# Altium PCB console_pcb.PcbDoc (part 1 of 2)
Units mil, origin at the board's own origin, x right, y up, seen from the top; angles counter-clockwise.
Board outline 3400 x 2600 mil, 2 copper layers (Top Layer, Bottom Layer); 190 components, 169 nets, 733 pads, 281 vias.
Unrouted connection lines stored in the file: 81.
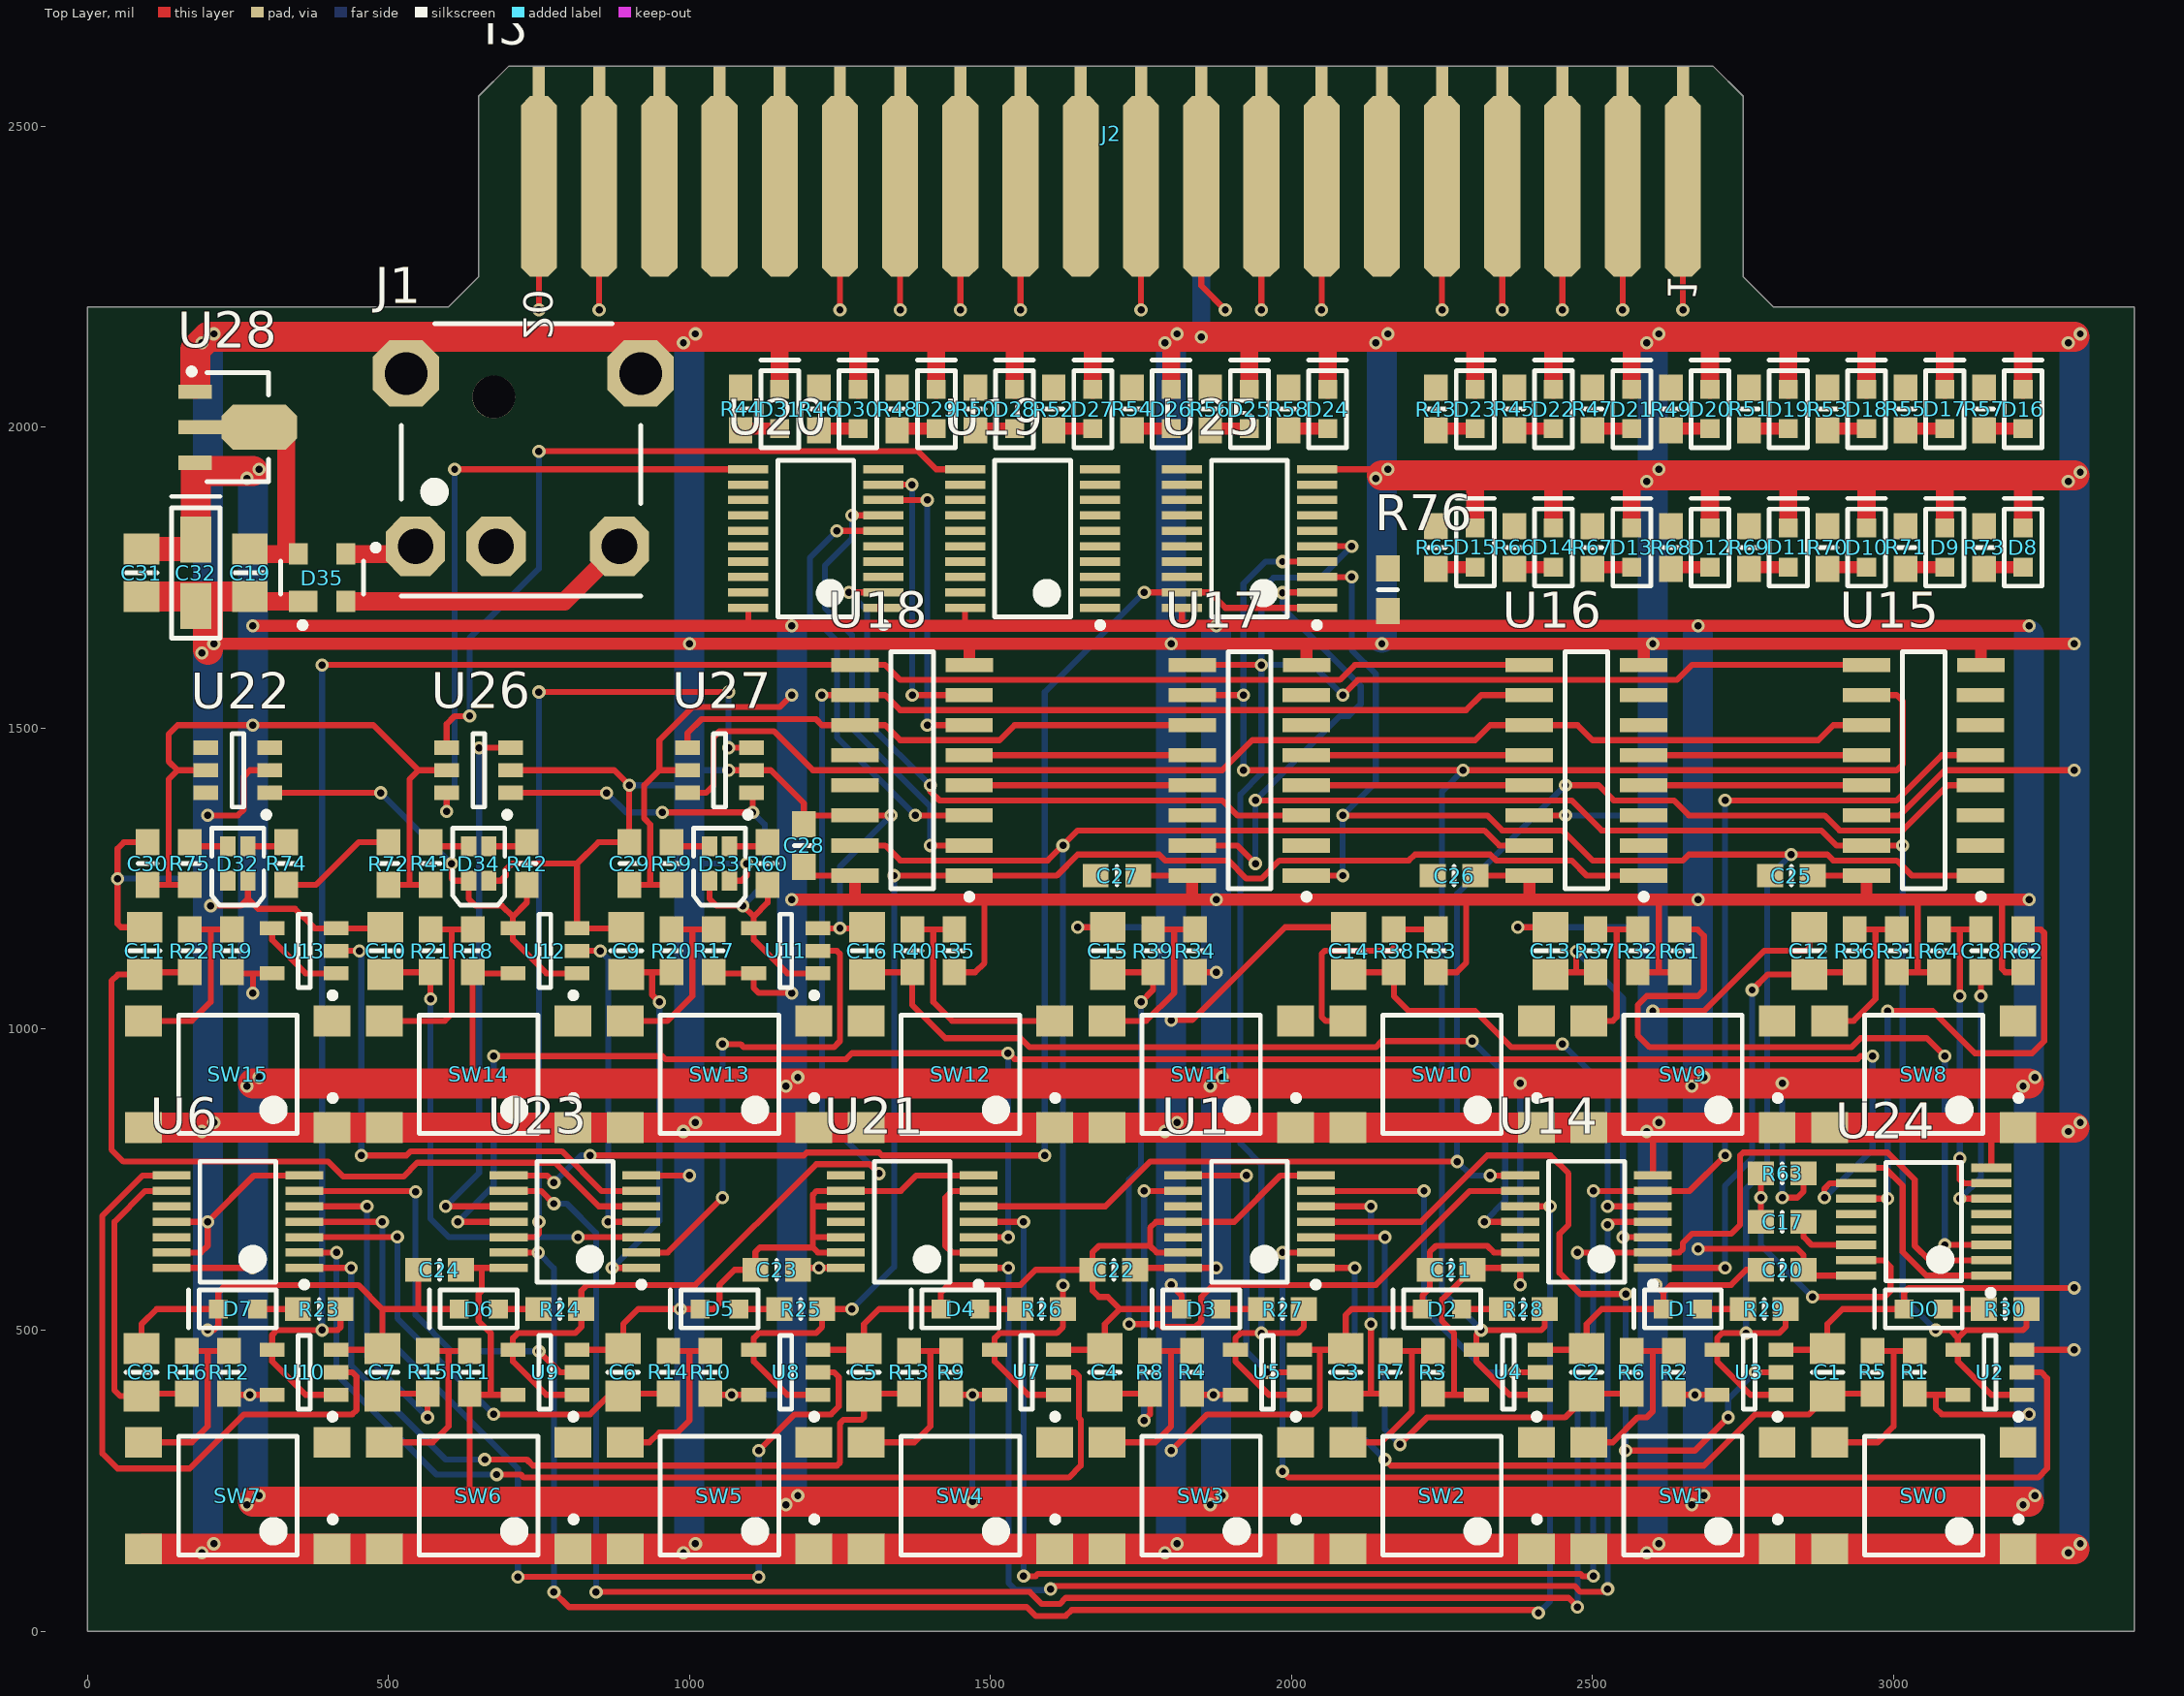
[diagram p0: Top Layer view]
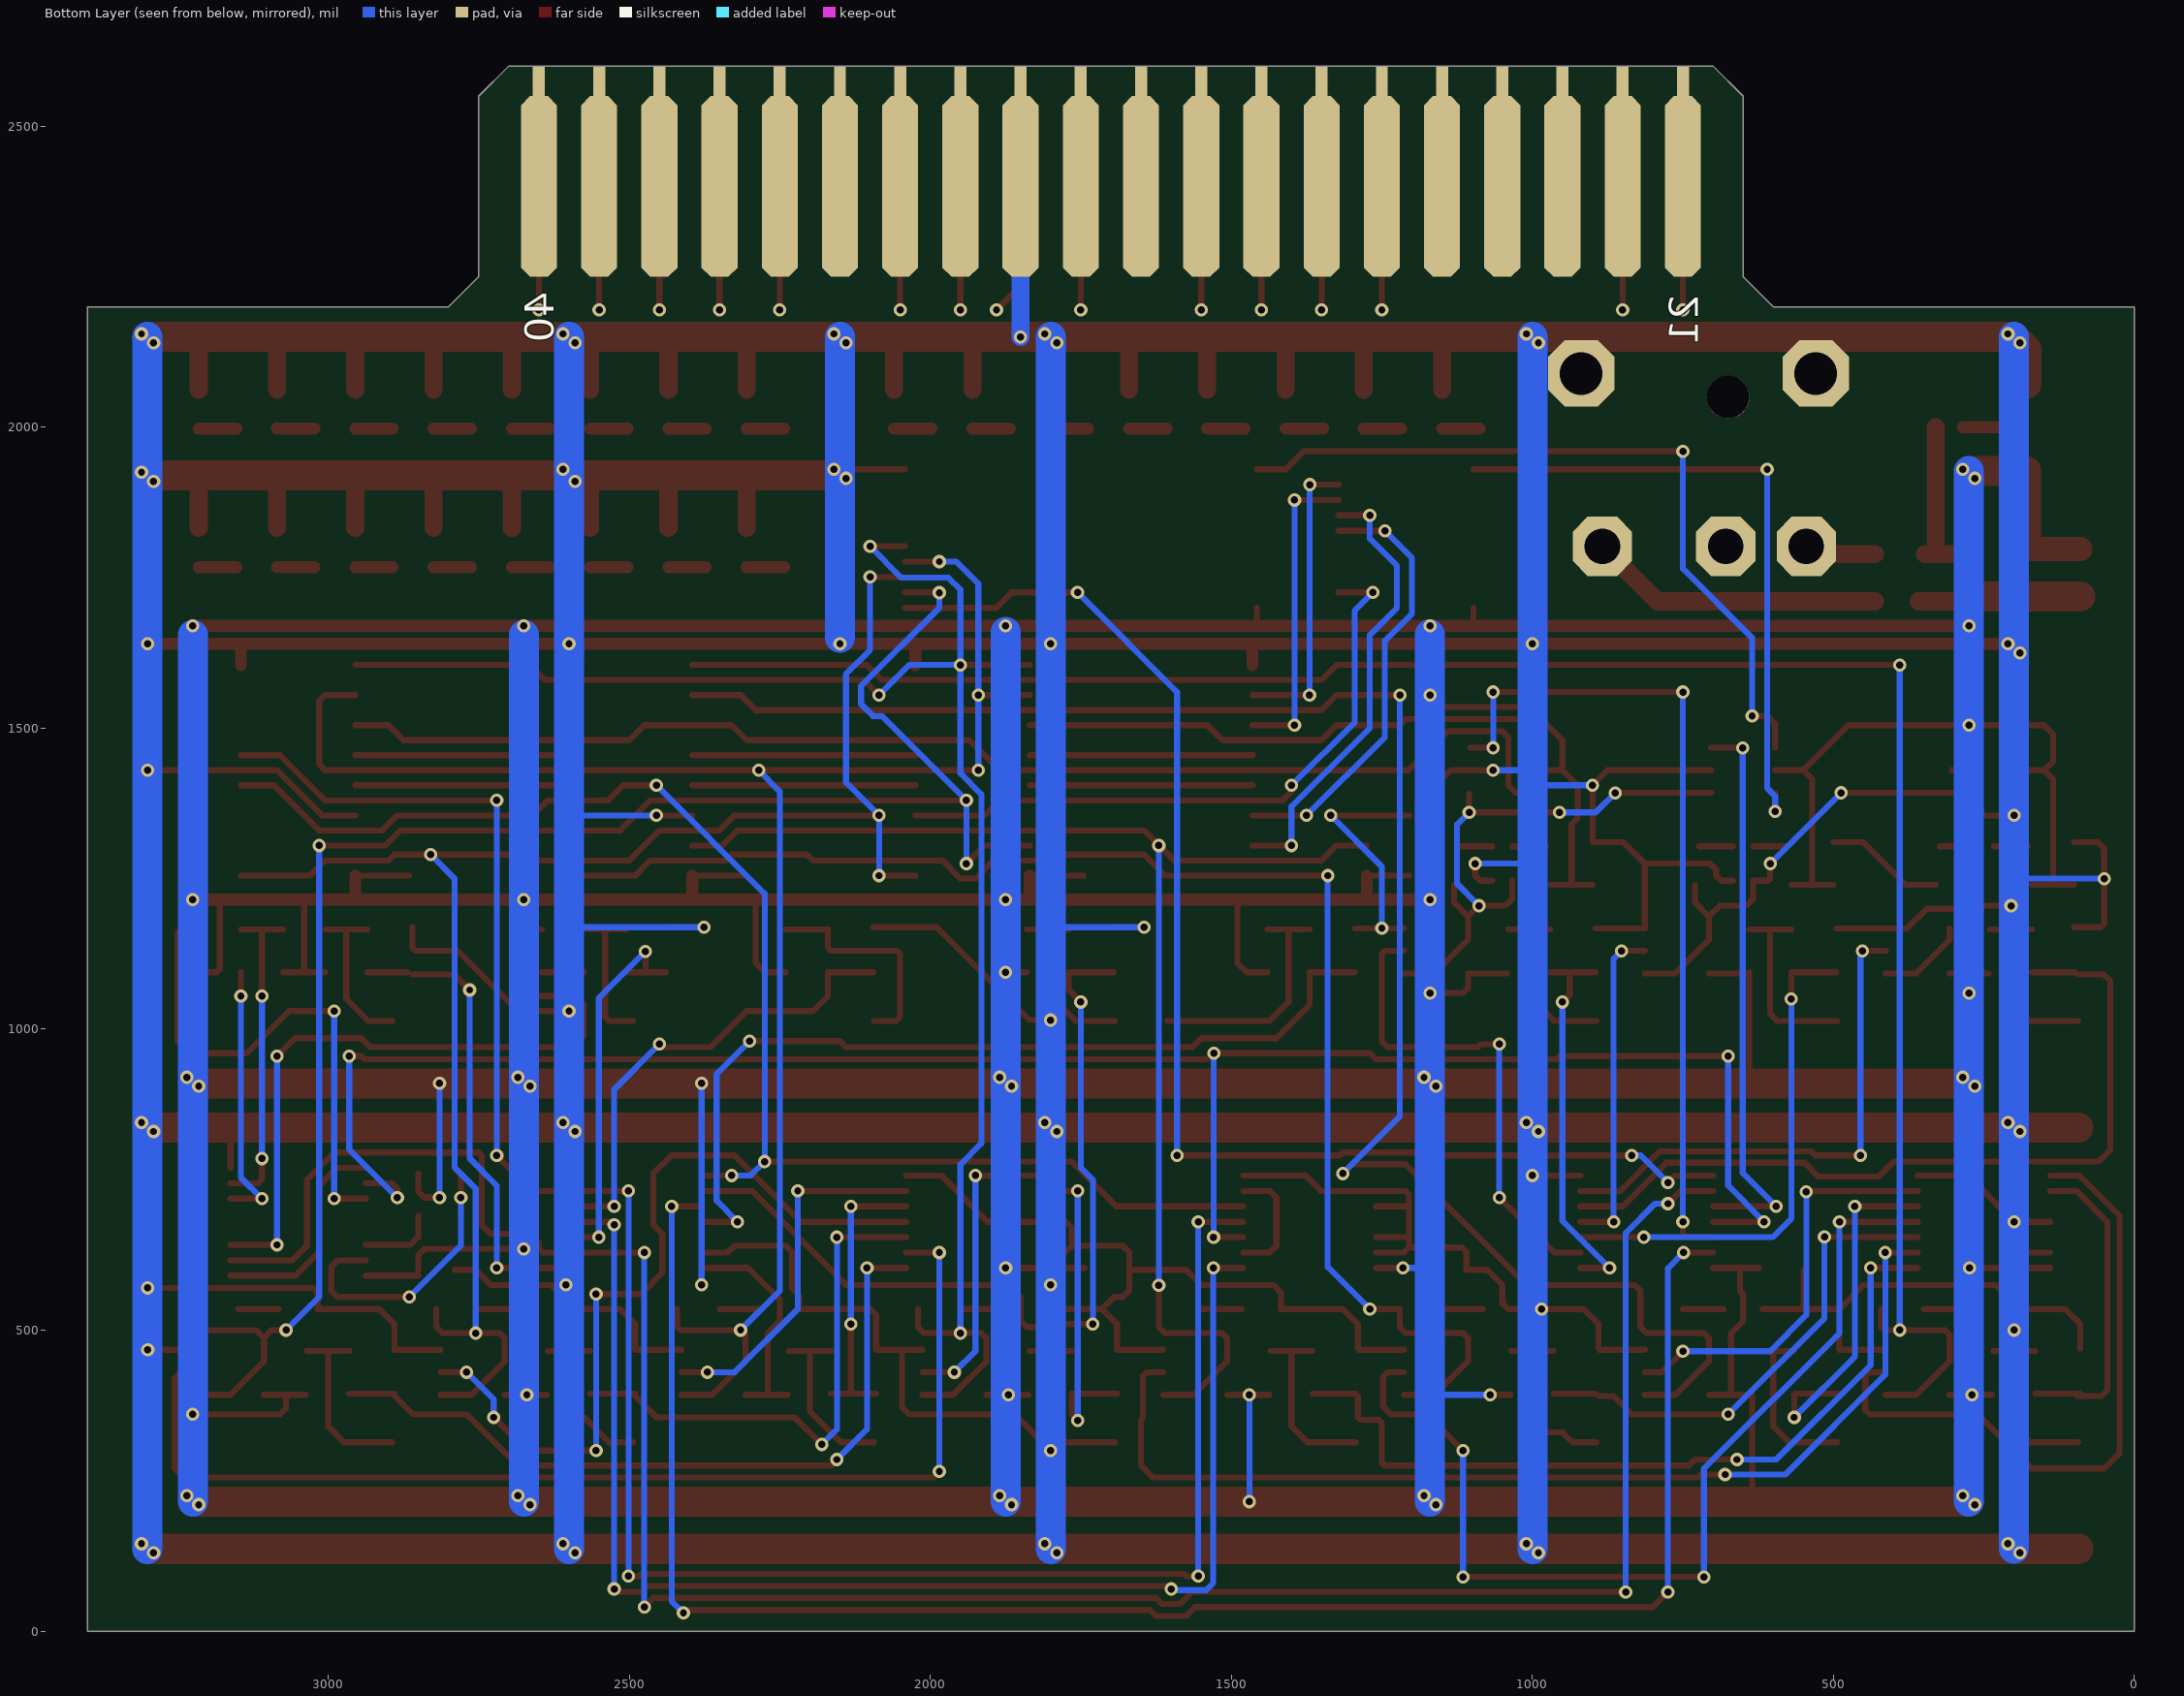
[diagram p1: Bottom Layer view, seen from below]

## Layer stack, top to bottom
Top Layer: signal copper 1.4
Dielectric: core 12.6, FR-4, Dk 4.8
Bottom Layer: signal copper 1.4

## Board outline
0,0 3400,0 3400,2200 2800,2200 2750,2250 2750,2550 2700,2600 700,2600 650,2550 650,2250 600,2200 0,2200 0,0

## Design rules (kind name [scope] priority, off if disabled: settings)
Clearance [All] p1: gap=7
ComponentClearance [All] p1: gap=0 collisioncheckmode=3 verticalgap=0 showdistances=FALSE
ComponentClearance "ComponentClearance Fiducial" [(HasFootprint('FIDUCIAL'))] p2: gap=-10 collisioncheckmode=3 verticalgap=-10 showdistances=FALSE
PolygonConnect [All] p1: connectstyle=Relief reliefconductorwidth=10 reliefentries=4 polygonreliefangle="90 Angle"
RoutingVias [All] p1: holewidth=12 width=22 viastyle="Through Hole" minholewidth=12 minwidth=22 maxholewidth=12 maxwidth=22
SilkscreenOverComponentPads [All] p1: minsilkscreentomaskgap=10
SolderMaskExpansion SolderMaskExpansion_VIA [isvia] p1: expansion=-50
SolderMaskExpansion [All] p2: expansion=6
Width [All] p1: maxlimit=100 minlimit=10 preferedwidth=10
26 further rules are at their usual default settings.

## Classes and differential pairs
component class console_schematic_logic: C17 C18 D8 D9 D10 D11 D12 D13 D14 D15 D16 D17 D18 D19 D20 D21 D22 D23 D24 D25 D26 D27 D28 D29 D30 D31 D32 D33 D34 J2 P1 R41 R42 R43 R44 R45 R46 R47 R48 R49 R50 R51 R52 R53 R54 R55 R56 R57 R58 R59 R60 R61 R62 R63 R64 R65 R66 R67 R68 R69 R70 R71 R72 R73 R74 R75 R76 U15 U16 U17 U18 U19 U20 U21 U22 U24 U25 U26 U27
component class console_schematic_switches: C1 C2 C3 C4 C5 C6 C7 C8 C9 C10 C11 C12 C13 C14 C15 C16 C19 C20 C21 C22 C23 C24 C25 C26 C27 C28 C29 C30 C31 C32 D0 D1 D2 D3 D4 D5 D6 D7 D35 D39 J1 R1 R2 R3 R4 R5 R6 R7 R8 R9 R10 R11 R12 R13 R14 R15 R16 R17 R18 R19 R20 R21 R22 R23 R24 R25 R26 R27 R28 R29 R30 R31 R32 R33 R34 R35 R36 R37 R38 R39 R40 SW0 SW1 SW2 SW3 SW4 SW5 SW6 SW7 SW8 SW9 SW10 SW11 SW12 SW13 SW14 SW15 SW16 U1 U2 U3 U4 U5 U6 U7 U8 U9 U10 U11 U12 U13 U14 U23 U28

## Components (designator, comment, footprint, x,y, rotation, side; value= is the part's Value field where it differs from the comment)
C1 "1uF" 0805 2890,430 r270 top
C2 "1uF" 0805 2490,430 r270 top
C3 "1uF" 0805 2090,430 r270 top
C4 "1uF" 0805 1690,430 r270 top
C5 "1uF" 0805 1290,430 r270 top
C6 "1uF" 0805 890,430 r270 top
C7 "1uF" 0805 490,430 r270 top
C8 "1uF" 0805 90,430 r270 top
C9 "1uF" 0805 895,1130 r270 top
C10 "1uF" 0805 495,1130 r270 top
C11 "1uF" 0805 95,1130 r270 top
C12 "1uF" 0805 2860,1130 r270 top
C13 "1uF" 0805 2430,1130 r270 top
C14 "1uF" 0805 2095,1130 r270 top
C15 "1uF" 0805 1695,1130 r270 top
C16 "1uF" 0805 1295,1130 r270 top
C17 "0.1uF" 0603 2815,680 r180 top
C18 "0.1uF" 0603 3145,1130 r90 top
C19 "1uF" 0805 270,1758 r270 top
C20 "0.1uF" 0603 2815,600 r0 top
C21 "0.1uF" 0603 2265,600 r0 top
C22 "0.1uF" 0603 1705,600 r0 top
C23 "0.1uF" 0603 1145,600 r0 top
C24 "0.1uF" 0603 585,600 r0 top
C25 "0.1uF" 0603 2830,1255 r0 top
C26 "0.1uF" 0603 2270,1255 r0 top
C27 "0.1uF" 0603 1710,1255 r0 top
C28 "0.1uF" 0603 1190,1305 r270 top
C29 "0.1uF" 0603 900,1275 r270 top
C30 "0.1uF" 0603 100,1275 r270 top
C31 "1uF" 0805 90,1758 r270 top
C32 "10uF" 1206_A 180,1758 r270 top
D0 "LTST-C190KRKT" APG1608 3050,535 r180 top
D1 "LTST-C190KRKT" APG1608 2650,535 r180 top
D2 "LTST-C190KRKT" APG1608 2250,535 r180 top
D3 "LTST-C190KRKT" APG1608 1850,535 r180 top
D4 "LTST-C190KRKT" APG1608 1450,535 r180 top
D5 "LTST-C190KRKT" APG1608 1050,535 r180 top
D6 "LTST-C190KRKT" APG1608 650,535 r180 top
D7 "LTST-C190KRKT" APG1608 250,535 r180 top
D8 "LTST-C190KRKT" APG1608 3215,1800 r90 top
D9 "LTST-C190KRKT" APG1608 3085,1800 r90 top
D10 "LTST-C190KRKT" APG1608 2955,1800 r90 top
D11 "LTST-C190KRKT" APG1608 2825,1800 r90 top
D12 "LTST-C190KRKT" APG1608 2695,1800 r90 top
D13 "LTST-C190KRKT" APG1608 2565,1800 r90 top
D14 "LTST-C190KRKT" APG1608 2435,1800 r90 top
D15 "LTST-C190KRKT" APG1608 2305,1800 r90 top
D16 "LTST-C190KRKT" APG1608 3215,2030 r90 top
D17 "LTST-C190KRKT" APG1608 3085,2030 r90 top
D18 "LTST-C190KRKT" APG1608 2955,2030 r90 top
D19 "LTST-C190KRKT" APG1608 2825,2030 r90 top
D20 "LTST-C190KRKT" APG1608 2695,2030 r90 top
D21 "LTST-C190KRKT" APG1608 2565,2030 r90 top
D22 "LTST-C190KRKT" APG1608 2435,2030 r90 top
D23 "LTST-C190KRKT" APG1608 2305,2030 r90 top
D24 "LTST-C190KRKT" APG1608 2060,2030 r90 top
D25 "LTST-C190KRKT" APG1608 1930,2030 r90 top
D26 "LTST-C190KRKT" APG1608 1800,2030 r90 top
D27 "LTST-C190KRKT" APG1608 1670,2030 r90 top
D28 "LTST-C190KRKT" APG1608 1540,2030 r90 top
D29 "LTST-C190KRKT" APG1608 1410,2030 r90 top
D30 "LTST-C190KRKT" APG1608 1280,2030 r90 top
D31 "LTST-C190KRKT" APG1608 1150,2030 r90 top
D32 "LTST-C195KGJRKT" LTST-C195KGJRKT 250,1275 r270 top
D33 "LTST-C195KGJRKT" LTST-C195KGJRKT 1050,1275 r270 top
D34 "LTST-C195KGJRKT" LTST-C195KGJRKT 650,1275 r270 top
D35 "BAS 3007A-RPP E6327" SOT143 390,1750 r0 top
J1 "PJ-051A" PJ-051A 675,2050 r270 top
J2 "CWR-170-40-0000" "CARD EDGE 40 PIN" 1700,2400 r0 top
R1 "47.0K" 0603 3035,430 r270 top
R2 "47.0K" 0603 2635,430 r270 top
R3 "47.0K" 0603 2235,430 r270 top
R4 "47.0K" 0603 1835,430 r270 top
R5 "18.0K" 0603 2965,430 r270 top
R6 "18.0K" 0603 2565,430 r270 top
R7 "18.0K" 0603 2165,430 r270 top
R8 "18.0K" 0603 1765,430 r270 top
R9 "47.0K" 0603 1435,430 r270 top
R10 "47.0K" 0603 1035,430 r270 top
R11 "47.0K" 0603 635,430 r270 top
R12 "47.0K" 0603 235,430 r270 top
R13 "18.0K" 0603 1365,430 r270 top
R14 "18.0K" 0603 965,430 r270 top
R15 "18.0K" 0603 565,430 r270 top
R16 "18.0K" 0603 165,430 r270 top
R17 "47.0K" 0603 1040,1130 r270 top
R18 "47.0K" 0603 640,1130 r270 top
R19 "47.0K" 0603 240,1130 r270 top
R20 "18.0K" 0603 970,1130 r270 top
R21 "18.0K" 0603 570,1130 r270 top
R22 "18.0K" 0603 170,1130 r270 top
R23 "680" 0603 385,535 r180 top
R24 "680" 0603 785,535 r180 top
R25 "680" 0603 1185,535 r180 top
R26 "680" 0603 1585,535 r180 top
R27 "680" 0603 1985,535 r180 top
R28 "680" 0603 2385,535 r180 top
R29 "680" 0603 2785,535 r180 top
R30 "680" 0603 3185,535 r180 top
R31 "47.0K" 0603 3005,1130 r270 top
R32 "47.0K" 0603 2575,1130 r270 top
R33 "47.0K" 0603 2240,1130 r270 top
R34 "47.0K" 0603 1840,1130 r270 top
R35 "47.0K" 0603 1440,1130 r270 top
R36 "18.0K" 0603 2935,1130 r270 top
R37 "18.0K" 0603 2505,1130 r270 top
R38 "18.0K" 0603 2170,1130 r270 top
R39 "18.0K" 0603 1770,1130 r270 top
R40 "18.0K" 0603 1370,1130 r270 top
R41 "680" 0603 570,1275 r90 top
R42 "680" 0603 730,1275 r90 top
R43 "680" 0603 2240,2030 r270 top
R44 "680" 0603 1085,2030 r270 top
R45 "680" 0603 2370,2030 r270 top
R46 "680" 0603 1215,2030 r270 top
R47 "680" 0603 2500,2030 r270 top
R48 "680" 0603 1345,2030 r270 top
R49 "680" 0603 2630,2030 r270 top
R50 "680" 0603 1475,2030 r270 top
R51 "680" 0603 2760,2030 r270 top
R52 "680" 0603 1605,2030 r270 top
R53 "680" 0603 2890,2030 r270 top
R54 "680" 0603 1735,2030 r270 top
R55 "680" 0603 3020,2030 r270 top
R56 "680" 0603 1865,2030 r270 top
R57 "680" 0603 3150,2030 r270 top
R58 "680" 0603 1995,2030 r270 top
R59 "680" 0603 970,1275 r270 top
R60 "680" 0603 1130,1275 r270 top
R61 "47.0K" 0603 2645,1130 r90 top
R62 "47.0K" 0603 3215,1130 r270 top
R63 "18.0K" 0603 2815,760 r180 top
R64 "18.0K" 0603 3075,1130 r90 top
R65 "680" 0603 2240,1800 r270 top
R66 "680" 0603 2370,1800 r270 top
R67 "680" 0603 2500,1800 r270 top
R68 "680" 0603 2630,1800 r270 top
R69 "680" 0603 2760,1800 r270 top
R70 "680" 0603 2890,1800 r270 top
R71 "680" 0603 3020,1800 r270 top
R72 "47.0K" 0603 500,1275 r90 top
R73 "680" 0603 3150,1800 r270 top
R74 "680" 0603 330,1275 r90 top
R75 "680" 0603 170,1275 r90 top
R76 "0R0" 0603 2160,1730 r90 top
SW0 "PTS645SM43SMTR LFS" "PTS645SM43SMTR LFS" 3050,225 r180 top
SW1 "PTS645SM43SMTR LFS" "PTS645SM43SMTR LFS" 2650,225 r180 top
SW2 "PTS645SM43SMTR LFS" "PTS645SM43SMTR LFS" 2250,225 r180 top
SW3 "PTS645SM43SMTR LFS" "PTS645SM43SMTR LFS" 1850,225 r180 top
SW4 "PTS645SM43SMTR LFS" "PTS645SM43SMTR LFS" 1450,225 r180 top
SW5 "PTS645SM43SMTR LFS" "PTS645SM43SMTR LFS" 1050,225 r180 top
SW6 "PTS645SM43SMTR LFS" "PTS645SM43SMTR LFS" 650,225 r180 top
SW7 "PTS645SM43SMTR LFS" "PTS645SM43SMTR LFS" 250,225 r180 top
SW8 "PTS645SM43SMTR LFS" "PTS645SM43SMTR LFS" 3050,925 r180 top
SW9 "PTS645SM43SMTR LFS" "PTS645SM43SMTR LFS" 2650,925 r180 top
SW10 "PTS645SM43SMTR LFS" "PTS645SM43SMTR LFS" 2250,925 r180 top
SW11 "PTS645SM43SMTR LFS" "PTS645SM43SMTR LFS" 1850,925 r180 top
SW12 "PTS645SM43SMTR LFS" "PTS645SM43SMTR LFS" 1450,925 r180 top
SW13 "PTS645SM43SMTR LFS" "PTS645SM43SMTR LFS" 1050,925 r180 top
SW14 "PTS645SM43SMTR LFS" "PTS645SM43SMTR LFS" 650,925 r180 top
SW15 "PTS645SM43SMTR LFS" "PTS645SM43SMTR LFS" 250,925 r180 top
U1 "SN74HC14PWR" PW014 1930,680 r180 top
U2 "SN74LVC1G80DBVR" "SOT-23-5 DBV R-PDSO-G5" 3160,430 r180 top
U3 "SN74LVC1G80DBVR" "SOT-23-5 DBV R-PDSO-G5" 2760,430 r180 top
U4 "SN74LVC1G80DBVR" "SOT-23-5 DBV R-PDSO-G5" 2360,430 r180 top
U5 "SN74LVC1G80DBVR" "SOT-23-5 DBV R-PDSO-G5" 1960,430 r180 top
U6 "SN74HC14PWR" PW014 250,680 r180 top
U7 "SN74LVC1G80DBVR" "SOT-23-5 DBV R-PDSO-G5" 1560,430 r180 top
U8 "SN74LVC1G80DBVR" "SOT-23-5 DBV R-PDSO-G5" 1160,430 r180 top
U9 "SN74LVC1G80DBVR" "SOT-23-5 DBV R-PDSO-G5" 760,430 r180 top
U10 "SN74LVC1G80DBVR" "SOT-23-5 DBV R-PDSO-G5" 360,430 r180 top
U11 "SN74LVC1G80DBVR" "SOT-23-5 DBV R-PDSO-G5" 1160,1130 r180 top
U12 "SN74LVC1G80DBVR" "SOT-23-5 DBV R-PDSO-G5" 760,1130 r180 top
U13 "SN74LVC1G80DBVR" "SOT-23-5 DBV R-PDSO-G5" 360,1130 r180 top
U14 "SN74HC14PWR" PW014 2490,680 r180 top
U15 "SN74HC193D" "DO16 D R-PDSO-G16" 3050,1430 r180 top
U16 "SN74HC193D" "DO16 D R-PDSO-G16" 2490,1430 r180 top
U17 "SN74HC193D" "DO16 D R-PDSO-G16" 1930,1430 r180 top
U18 "SN74HC193D" "DO16 D R-PDSO-G16" 1370,1430 r180 top
U19 "SN74HC573APWR" PW020 1570,1815 r180 top
U20 "SN74HC573APWR" PW020 1210,1815 r180 top
U21 "SN74LV32APWR" PW014 1370,680 r180 top
U22 "SN74LVC1G19DBVR" "SOT-23-6 DBV R-PDSO-G6" 250,1430 r180 top
U23 "SN74HC14PWR" PW014 810,680 r180 top
U24 "CD74HC123PWR" PW016 3050,680 r180 top
U25 "SN74HC541PWR" PW020 1930,1815 r180 top
U26 "SN74LVC1G19DBVR" "SOT-23-6 DBV R-PDSO-G6" 650,1430 r180 top
U27 "SN74LVC1G19DBVR" "SOT-23-6 DBV R-PDSO-G6" 1050,1430 r180 top
U28 "MCP1702T-5002E/MB" SOT-89 250,2000 r0 top

## Footprints (in the part's own frame and the unit in brackets; to place one, negate y for a bottom-side part, rotate by r counter-clockwise, add the part's x,y. Pads: shape width x height; smd on the part's side, far side on the other; paste and mask are expansions set on the pad)
0603 [mm]
  rect 1.1x1 smd: 1(-0.9,0) 2(0.9,0)
  silkscreen extent 0,-0.4 0,0.4, body extent -0.87,-0.47 0.87,0.47, height 0.8
0805 [mm]
  rect 1.3x1.5 smd: 1(-1,0) 2(1,0)
  silkscreen extent 0,-0.65 0,0.65, body extent -1.1,-0.72 1.1,0.72, height 1.27
1206_A [mm]
  rect 1.95x1.3 smd: 1(-1.4,0) 2(1.4,0)
  silkscreen extent -3.22,-1.02 2.75,1.02, body extent -1.6,-0.8 1.6,0.8, height 1.8
APG1608 [mm] "1.6mm X 0.8mm SMD LED"
  rect 0.8x0.8 smd: 1(-0.825,0) 2(0.825,0)
  silkscreen extent -1.62,-0.8 2.07,0.8, body extent -0.8,-0.4 0.8,0.4, height 1.8
"CARD EDGE 40 PIN" [mil] "CARD EDGE 40 PIN FOR CWR-170-40-0000"
  oct 60x300 smd paste-39.37 mask-39.37: 1(950,0) 2(850,0) 3(750,0) 4(650,0) 5(550,0) 6(450,0) 7(350,0) 8(250,0) 9(150,0) 10(50,0) 11(-50,0) 12(-150,0) 13(-250,0) 14(-350,0) 15(-450,0) 16(-550,0) 17(-650,0) 18(-750,0) 19(-850,0) 20(-950,0)
  rect 20x50 smd paste-39.37 mask-39.37: 1(950,175) 2(850,175) 3(750,175) 4(650,175) 5(550,175) 6(450,175) 7(350,175) 8(250,175) 9(150,175) 10(50,175) 11(-50,175) 12(-150,175) 13(-250,175) 14(-350,175) 15(-450,175) 16(-550,175) 17(-650,175) 18(-750,175) 19(-850,175) 20(-950,175)
  oct 60x300 smd far side paste-39.37 mask-39.37: 21(-950,0) 22(-850,0) 23(-750,0) 24(-650,0) 25(-550,0) 26(-450,0) 27(-350,0) 28(-250,0) 29(-150,0) 30(-50,0) 31(50,0) 32(150,0) 33(250,0) 34(350,0) 35(450,0) 36(550,0) 37(650,0) 38(750,0) 39(850,0) 40(950,0)
  rect 20x50 smd far side paste-39.37 mask-39.37: 21(-950,175) 22(-850,175) 23(-750,175) 24(-650,175) 25(-550,175) 26(-450,175) 27(-350,175) 28(-250,175) 29(-150,175) 30(-50,175) 31(50,175) 32(150,175) 33(250,175) 34(350,175) 35(450,175) 36(550,175) 37(650,175) 38(750,175) 39(850,175) 40(950,175)
"DO16 D R-PDSO-G16" [mm]
  rect 2x0.6 smd: 1(-2.4,4.445) 2(-2.4,3.175) 3(-2.4,1.905) 4(-2.4,0.635) 5(-2.4,-0.635) 6(-2.4,-1.905) 7(-2.4,-3.175) 8(-2.413,-4.445) 9(2.413,-4.445) 10(2.413,-3.175) 11(2.413,-1.905) 12(2.413,-0.635) 13(2.413,0.635) 14(2.413,1.905) 15(2.413,3.175) 16(2.413,4.445)
  silkscreen extent -2.54,-5 0.9,5.46, body extent -2,-5 2,5, height 1.75
LTST-C195KGJRKT [mm] "LED GREEN/RED BICOLOR 0606 SMD"
  rect 0.85x0.65 smd: 1(-0.725,0.425) 2(-0.725,-0.425) 3(0.725,0.425) 4(0.725,-0.425)
  silkscreen extent -1.5,-1.1 1.75,1.1, body extent -0.8,-0.75 0.8,0.75, height 0.55
PJ-051A [mm] "DC POWER JACK"
  oct 2.5x2.5 hole 1.5: 1(6.3,-3.3) 2(6.3,5.3) 3(6.3,0.1)
  oct 2.8x2.8 hole 1.8: 4(-1,-3.7) 5(-1,6.2)
  round 1.8 hole 1.8 unplated: 6(0,0)
  silkscreen extent -3.1,-5.1 8.4,6.2, body extent -3.1,-3.9 8.4,6.2, height 7.3
"PTS645SM43SMTR LFS" [mm] "SWITCH TACT 6MM 160GF H=4.3MM"
  rect 1.55x1.3 smd: 1(-3.975,2.25) 2(3.975,2.25) 3(-3.975,-2.25) 4(3.975,-2.25)
  silkscreen extent -4.13,-2.5 2.5,2.5, body extent -3,-3 3,3, height 4.3
PW014 [mm]
  rect 1.6x0.35 smd: 1(-2.8,1.95) 2(-2.8,1.3) 3(-2.8,0.65) 4(-2.8,0) 5(-2.8,-0.65) 6(-2.8,-1.3) 7(-2.8,-1.95) 8(2.8,-1.95) 9(2.8,-1.3) 10(2.8,-0.65) 11(2.8,0) 12(2.8,0.65) 13(2.8,1.3) 14(2.8,1.95)
  silkscreen extent -2.93,-2.55 1.6,2.77, body extent -2.25,-2.55 2.25,2.55, height 1.2
PW016 [mm]
  rect 1.7x0.35 smd: 1(-2.85,2.275) 2(-2.85,1.625) 3(-2.85,0.975) 4(-2.85,0.325) 5(-2.85,-0.325) 6(-2.85,-0.975) 7(-2.85,-1.625) 8(-2.85,-2.275) 9(2.85,-2.275) 10(2.85,-1.625) 11(2.85,-0.975) 12(2.85,-0.325) 13(2.85,0.325) 14(2.85,0.975) 15(2.85,1.625) 16(2.85,2.275)
  silkscreen extent -2.95,-2.5 1.6,3.12, body extent -2.2,-2.5 2.2,2.5, height 1.2
PW020 [mm]
  rect 1.7x0.35 smd: 1(-2.85,2.925) 2(-2.85,2.275) 3(-2.85,1.625) 4(-2.85,0.975) 5(-2.85,0.325) 6(-2.85,-0.325) 7(-2.85,-0.975) 8(-2.85,-1.625) 9(-2.85,-2.275) 10(-2.85,-2.925) 11(2.85,-2.925) 12(2.85,-2.275) 13(2.85,-1.625) 14(2.85,-0.975) 15(2.85,-0.325) 16(2.85,0.325) 17(2.85,0.975) 18(2.85,1.625) 19(2.85,2.275) 20(2.85,2.925)
  silkscreen extent -2.98,-3.3 1.6,3.77, body extent -2.25,-3.3 2.25,3.3, height 1.2
SOT143 [mm] "SOT-143; 4 Leads; Body 3 x 2.6 mm, inc. leads (LxW max)"
  rect 1.2x0.9 smd paste+0: 1(-0.8,-1)
  rect 0.8x0.9 smd: 2(1,-1) 3(1,1) 4(-1,1)
  silkscreen extent -1.75,-2.12 1.75,0.7, body extent -1.5,-0.7 1.5,0.7, height 1.1
"SOT-23-5 DBV R-PDSO-G5" [mm] "SOT-23-5 TI DBV"
  rect 1.05x0.6 smd mask+0.178: 1(-1.35,0.95) 2(-1.35,0) 3(-1.35,-0.95) 4(1.35,-0.95) 5(1.35,0.95)
  silkscreen extent -1.33,-1.55 0.25,2, body extent -0.8,-1.45 0.8,1.45, height 1.1
"SOT-23-6 DBV R-PDSO-G6" [mm] "SOT-23-6 TI DBV"
  rect 1.05x0.6 smd: 1(-1.35,0.95) 2(-1.35,0) 3(-1.35,-0.95) 4(1.35,-0.95) 5(1.35,0) 6(1.35,0.95)
  silkscreen extent -1.33,-1.55 0.25,2, body extent -0.8,-1.45 0.8,1.45, height 1.1
SOT-89 [mm]
  rect 1.4x0.6 smd: 1(-1.8,1.5) 3(-1.8,-1.5)
  rect 1.8x0.6 smd: 2(-1.6,0)
  oct 3.2x1.9 smd: 2(0.9,0)
  silkscreen extent -2.07,-2.3 1.3,2.47, body extent -1.3,-2.3 1.3,2.3, height 1.6

## Part data
C1 C2 C3 C4 C5 C6 C7 C8 C9 C10 C11 C12 C13 C14 C15 C16 C19 C31: library part C0805, "CAP 1.0UF 16V CERAMIC X7R 0805"
C17 C18 C20 C21 C22 C23 C24 C25 C26 C27 C28 C29 C30: library part C0603, "CAP .10UF 16V CERAMIC X7R 0603"
C32: library part T491A, "CAPACITOR TANT 10UF 10V 10% SMD"
D0 D1 D2 D3 D4 D5 D6 D7 D8 D9 D10 D11 D12 D13 D14 D15 D16 D17 D18 D19 D20 D21 D22 D23 D24 D25 D26 D27 D28 D29 D30 D31: "LED SUPER RED CLEAR 0603 SMD"
D32 D33 D34: "LED GREEN/RED BICOLOR 0606 SMD"
D35: "DIODE SCHOTTKY 30V 900MA SOT143"
J1: "CON PWR JCK 2.0 X 6.0MM W/SHLD"
J2: "CONN CARD EDGE 40PIN GOLD"
R1 R2 R3 R4 R9 R10 R11 R12 R17 R18 R19 R31 R32 R33 R34 R35 R61 R62 R72: library part MCR03EZPFX, "RES 47.0K OHM 1/10W 1% 0603 SMD"
R5 R6 R7 R8 R13 R14 R15 R16 R20 R21 R22 R36 R37 R38 R39 R40 R63 R64: library part MCR03EZPFX, "RES 18.0K OHM 1/10W 1% 0603 SMD"
R23 R24 R25 R26 R27 R28 R29 R30 R41 R42 R43 R44 R45 R46 R47 R48 R49 R50 R51 R52 R53 R54 R55 R56 R57 R58 R59 R60 R65 R66 R67 R68 R69 R70 R71 R73 R74 R75: library part MCR03EZPFX, "RES 680 OHM 1/10W 1% 0603 SMD"
R76: library part ERJ-3EKF1002V, "RES 0.0 OHM 1/10W 0603 SMD"
SW0 SW1 SW2 SW3 SW4 SW5 SW6 SW7 SW8 SW9 SW10 SW11 SW12 SW13 SW14 SW15: "SWITCH TACT 6MM 160GF H=4.3MM"
U1 U6 U14 U23: "IC HEX SCHMITT-TRIG INV 14-TSSOP"
U2 U3 U4 U5 U7 U8 U9 U10 U11 U12 U13: "IC POSITIVE D-TYPE F-F SOT-23-5"
U15 U16 U17 U18: "IC 4-BIT UP/DOWN COUNTER 16-SOIC"
U19 U20: "IC OCTAL TRANSP LATCH 20-TSSOP"
U21: "IC QUAD 2-IN OR GATE 14-TSSOP"
U22 U26 U27: "IC MUX/DECODER SNGL 1OF2 SOT23-6"
U24: "IC DUAL RETRIG MULTIVIB 16-TSSOP"
U25: "IC BUFF/DVR TRI-ST 8BIT 20TSSOP"
U28: "IC REG LDO 5V 250MA SOT-89-3"

## Via types
v1: diameter 22, hole 12, Top Layer to Bottom Layer, 281 vias

## Nets (pads, with @x,y where several pads share a name; then routed paths per layer and width w, separated by ;. In a path a pad name is that pad's centre, name@x,y a point inside that pad or via, vN(x,y) a via of type N, cw(c..) or ccw(c..) an arc to the next point about the centre after c; other vN are vias at no path point)
A0: J2.31 R57.1 U19.19
A1: J2.30 R55.1 U19.18
A2: J2.29 R53.1 U19.17
A3: J2.28 R51.1 U19.16
A4: J2.27 R49.1 U19.15
A5: J2.26 R47.1 U19.14
A6: J2.25 R45.1 U19.13
A7: J2.24 R43.1 U19.12
A8: J2.23 R58.1 U20.19
A9: J2.22 R56.1 U20.18
A10: J2.21 R54.1 U20.17
A11: J2.1 R52.1 U20.16 | length 205
  Top Layer w10: v1(2650,2195) J2.1@2650,2400
A12: J2.2 R50.1 U20.15 | length 205
  Top Layer w10: v1(2550,2195) J2.2@2550,2400
A13: J2.3 R48.1 U20.14 | length 205
  Top Layer w10: v1(2450,2195) J2.3@2450,2400
A14: J2.4 R46.1 U20.13 | length 205
  Top Layer w10: v1(2350,2195) J2.4@2350,2400
A15: J2.5 R44.1 U20.12 | length 205
  Top Layer w10: v1(2250,2195) J2.5@2250,2400
AD_HI_L\D\: U17.11 U18.11 U27.4 | length 897
  Top Layer w10: U27.4@996.85,1467.4 996.85,1491.85 1020,1515 1210,1515 1220,1505 U18.11@1275,1505 1325,1505 1350,1480 1515,1480 1540,1505 U17.11@1835,1505
AD_HI_LE: U20.11 U26.6 | length 1092.2
  Top Layer w10: v1(596.85,1361.85) U26.6@596.85,1392.6 ; v1(610,1930) 610.16,1930.16 U20.11@1097.8,1930.16
  Bottom Layer w10: v1(596.85,1361.85) 596.85,1386.85 610,1400 v1(610,1930)
AD_LO_L\D\: U15.11 U16.11 U27.6 | length 2126.1
  Top Layer w10: U27.6@996.85,1392.6 1027.6,1392.6 1040,1405 1040,1485 1050,1495 1140,1495 1205,1430 1885,1430 1935,1480 2305,1480 2330,1505 U16.11@2395,1505 2475,1505 2500,1480 2875,1480 2900,1505 U15.11@2955,1505
AD_LO_LE: U19.11 U26.4 | length 1290.8
  Top Layer w10: U26.4@596.85,1467.4 596.85,1506.85 610,1520 v1(635,1520) ; v1(750,1960) 1380,1960 1409.84,1930.16 U19.11@1457.8,1930.16
  Bottom Layer w10: v1(635,1520) 635,1650 750,1765 v1(750,1960)
B\U\S\A\C\K\: D32.4 J2.38 R72.2 R74.1 U24.1 U24.9 | length 562.4
  Top Layer w10: R74.1@330,1239.57 379.57,1239.57 450.43,1310.43 R72.2@500,1310.43 ; U24.9@2937.8,769.57 2985.43,769.57 3015,740 3015,630 3054.57,590.43 U24.1@3162.2,590.43
B\U\S\R\E\Q\: J2.36 U13.1 U13.4 U19.1 U20.1 U22.3 | length 148.6
  Top Layer w10: U13.4@306.85,1167.4 306.85,1148.15 362.4,1092.6 U13.1@413.15,1092.6
D0: J2.14 R73.1 U25.18 | length 205
  Top Layer w10: v1(1350,2195) J2.14@1350,2400
D1: J2.15 R71.1 U25.17 | length 205
  Top Layer w10: v1(1250,2195) J2.15@1250,2400
D2: J2.12 R70.1 U25.16 | length 205
  Top Layer w10: v1(1550,2195) J2.12@1550,2400
D3: J2.8 R69.1 U25.15 | length 205
  Top Layer w10: v1(1950,2195) J2.8@1950,2400
D4: J2.7 R68.1 U25.14 | length 205
  Top Layer w10: v1(2050,2195) J2.7@2050,2400
D5: J2.9 R67.1 U25.13 | length 221.6
  Top Layer w10: J2.9@1850,2400 1850,2235 v1(1890,2195)
D6: J2.10 R66.1 U25.12 | length 205
  Top Layer w10: v1(1750,2195) J2.10@1750,2400
D7: J2.13 R65.1 U25.11 | length 205
  Top Layer w10: v1(1450,2195) J2.13@1450,2400
GND: C1.1 C2.1 C3.1 C4.1 C5.1 C6.1 C7.1 C8.1 C9.1 C10.1 C11.1 C12.1 C13.1 C14.1 C15.1 C16.1 C19.2 C20.1 C21.1 C22.1 C23.1 C24.1 C25.1 C26.1 C27.1 C28.1 C29.1 C30.1 C31.2 C32.2 D0.2 D1.2 D2.2 D3.2 D4.2 D5.2 D6.2 D7.2 D8.2 D9.2 D10.2 D11.2 D12.2 D13.2 D14.2 D15.2 D16.2 D17.2 D18.2 D19.2 D20.2 D21.2 D22.2 D23.2 D24.2 D25.2 D26.2 D27.2 D28.2 D29.2 D30.2 D31.2 D32.3 D33.3 D34.3 D35.1 J1.4 J1.5 J2.32 SW0.1 SW0.2 SW1.1 SW1.2 SW2.1 SW2.2 SW3.1 SW3.2 SW4.1 SW4.2 SW5.1 SW5.2 SW6.1 SW6.2 SW7.1 SW7.2 SW8.1 SW8.2 SW9.1 SW9.2 SW10.1 SW10.2 SW11.1 SW11.2 SW12.1 SW12.2 SW13.1 SW13.2 SW14.1 SW14.2 SW15.1 SW15.2 U1.7 U1.11 U1.13 U2.3 U3.3 U4.3 U5.3 U6.7 U6.11 U6.13 U7.3 U8.3 U9.3 U10.3 U11.3 U12.3 U13.3 U14.7 U14.13 U15.8 U15.14 U16.8 U16.14 U17.8 U17.14 U18.8 U18.14 U19.10 U20.10 U21.7 U21.9 U21.10 U21.12 U21.13 U22.2 U23.7 U24.8 U25.10 U26.2 U27.2 U28.1 | length 37733.9
  Top Layer w10: C8.1@90,469.37 90,510 115,535 D7.2@217.52,535 ; C11.1@100,1169.37 55.63,1169.37 50,1175 50,1300 60.43,1310.43 C30.1@100,1310.43 ; U6.13@139.76,628.82 188.82,628.82 200,640 v1(200,680) ; U6.11@139.76,680 v1(200,680) ; v1(200,500) 210,500 217.52,507.52 D7.2@217.52,535 ; v1(200,1355) 250,1355 260,1365 260,1420 270,1430 U22.2@303.15,1430 ; v1(205,1205) 255,1205 266.73,1216.73 ; D32.3@266.73,1246.46 266.73,1216.73 ; U6.7@360.24,756.77 276.77,756.77 v1(200,680) ; U10.3@413.15,467.4 490,467.4 490,535 ; C10.1@495,1167.4 377.6,1167.4 345,1200 283.46,1200 266.73,1216.73 ; 549.57,535.43 C24.1@549.57,600 ; D6.2@617.52,535 490,535 ; D34.3@666.73,1246.46 686.46,1246.46 695,1255 695,1265 705,1275 813.15,1275 ; U26.2@703.15,1430 875,1430 v1(900,1405) C29.1@900,1310.43 848.43,1310.43 813.15,1275.15 813.15,1167.4 C9.1@895,1167.4 ; U9.3@813.15,467.4 888.03,467.4 C6.1@890,469.37 890,510 915,535 D5.2@1017.52,535 1040,535 1050,545 1050,575 1075,600 C23.1@1109.57,600 1109.57,629.57 1117,637 1205,637 ; U23.7@920.24,756.77 v1(1000,756.77) ; v1(1065,1430) U27.2@1103.15,1430 1135,1430 1190,1375 C28.1@1190,1340.43 ; D33.3@1066.73,1246.46 1086.46,1246.46 1095,1255 v1(1095,1275) ; C28.1@1204.57,1355 v1(1335,1355) ; 1205.41,705.59 U21.10@1259.76,705.59 ; 1205.59,654.41 U21.12@1259.76,654.41 ; U8.3@1213.15,467.4 C5.1@1288.03,467.4 ; U11.3@1213.15,1167.4 v1(1250,1167.4) C16.1@1295,1167.4 ; U21.13@1259.76,628.82 1213.18,628.82 1205,637 ; C5.1@1290,469.37 1290,510 1315,535 D4.2@1417.52,535 1417.52,562.52 1430,575 1550,575 1575,600 C22.1@1669.57,600 ; U21.7@1480.24,756.77 1376.77,756.77 1351.18,731.18 U21.9@1259.76,731.18 1211.18,731.18 1205,725 1205,637 ; U7.3@1613.15,467.4 C4.1@1690,467.4 ; v1(1645,1169.37) C15.1@1695,1169.37 ; C4.1@1690,469.37 1690,510 1715,535 ; v1(1800,300) 1860,360 2035,360 2047,372 2047,467.4 ; v1(1800,575) 1817.52,557.48 D3.2@1817.52,535 1715,535 ; v1(1800,1015) 1835,1015 1989.37,1169.37 C14.1@2095,1169.37 ; U1.13@1819.76,628.82 1776.18,628.82 1765,640 ; U5.3@2013.15,467.4 2047,467.4 ; U1.7@2040.24,756.77 1981.77,756.77 1905,680 U1.11@1819.76,680 1775,680 1765,670 1765,640 ; U25.10@2042.2,1930.16 2145.16,1930.16 ; v1(2375.63,1169.37) C13.1@2430,1169.37 ; U14.13@2379.76,628.82 2336.18,628.82 2325,640 2240,640 2229.57,629.57 C21.1@2229.57,600 2229.57,569.57 2217.52,557.52 D2.2@2217.52,535 2100,535 2090,525 2090,467.4 2047,467.4 ; U16.14@2395,1355 v1(2455,1355) ; U4.3@2413.15,467.4 2490,467.4 2490,510 2515,535 D1.2@2617.52,535 2617.52,562.52 ; v1(2600,1030) 2685,1030 2785,1130 2855,1130 2860,1135 C12.1@2860,1169.37 ; U14.7@2600.24,756.77 2600.24,836.18 ; v1(2605.04,575) 2617.52,562.52 ; C20.1@2789.57,600 2755,600 2730,575 2630,575 2617.52,562.52 ; U3.3@2813.15,467.4 C1.1@2890,467.4 ; C1.1@2890,469.37 2890,510 2915,535 D0.2@3017.52,535 3017.52,562.52 3025,570 v1(3300,570) ; U15.14@2955,1355 3010,1355 3085,1430 v1(3300,1430) ; U24.8@3162.2,769.57 3162.2,834.21 ; U2.3@3213.15,467.4 v1(3299.6,467.4) ; D7.2@217.52,535 217.52,562.52 230,575 450,575 490,535 ; C22.1@1669.57,600 1669.57,565.43 1680,555 1695,555 1715,535 ; C22.1@1669.57,600 1669.57,629.57 1680,640 1765,640
  Top Layer w20: v1(210,1640) v1(1000,1640) 2585,1640 ; U18.8@1465,1605 1465,1640 ; U17.8@2025,1605 2025,1640 ; U16.8@2585,1605 2585,1640 ; U15.8@3145,1605 3145,1640 ; v1(3300,1640) v1(2600,1640) 2585,1640
  Top Layer w30: C19.2@270,1710.63 D35.1@358.5,1710.63 ; D31.2@1150,2062.48 1150,2150 ; D30.2@1280,2062.48 1280,2150 ; D29.2@1410,2062.48 1410,2150 ; D28.2@1540,2062.48 1540,2150 ; D27.2@1670,2062.48 1670,2150 ; D26.2@1800,2062.48 1800,2150 ; D25.2@1930,2062.48 1930,2150 ; D24.2@2060,2062.48 2060,2150 ; D15.2@2305,1832.48 2305,1920 ; D23.2@2305,2062.48 2305,2150 ; D14.2@2435,1832.48 2435,1920 ; D22.2@2435,2062.48 2435,2150 ; D13.2@2565,1832.48 2565,1920 ; D21.2@2565,2062.48 2565,2150 ; D12.2@2695,1832.48 2695,1920 ; D20.2@2695,2062.48 2695,2150 ; D11.2@2825,1832.48 2825,1920 ; D19.2@2825,2062.48 2825,2150 ; D10.2@2955,1832.48 2955,1920 ; D18.2@2955,2062.48 2955,2150 ; D9.2@3085,1832.48 3085,1920 ; D17.2@3085,2062.48 3085,2150 ; D8.2@3215,1832.48 3215,1920 ; D16.2@3215,2062.48 3215,2150
  Top Layer w50: C31.2@90,1718.63 C19.2@270,1718.63 ; SW7.2@93.5,136.42 3300,136.42 ; SW15.2@93.5,836.42 3300,836.42 ; 179.13,2072.5 179.13,2129.13 200,2150 3300,2150 ; 200,1630 C32.2@200,1709.88 ; 2150,1920 3300,1920
  Bottom Layer w10: v1(50,1250) 200,1250 ; v1(900,1405) 1000,1405 ; 1000,1275 v1(1095,1275) ; 1000,1430 v1(1065,1430) ; v1(1250,1167.4) 1250,1270 v1(1335,1355) ; v1(1645,1169.37) 1799.37,1169.37 ; v1@2375,1169.37 2599.37,1169.37 ; v1(2455,1355) 2600,1355
  Bottom Layer w30: v1(1850,2150) J2.32@1850,2400
  Bottom Layer w50: 200,137 200,2150 ; 1000,136.42 1000,2150 ; 1800,136.42 1800,2150 ; v1@2150,1650 2150,2150 ; 2600,136.42 2600,2150 ; 3300,136.42 3300,2150
  other v1: 190,130 990,130 1790,130 2590,130 3290,130 210,145 1010,145 1810,145 2610,145 3310,145 985,535 190,830 990,830 1790,830 2590,830 3290,830 210,845 1010,845 1810,845 2610,845 3310,845 190,1625 1800,1640 2150,1640 2590,1910 3290,1910 2140,1915 3310,1925 2160,1930 2610,1930 190,2140 990,2140 1790,2140 2140,2140 2590,2140 3290,2140 210,2155 1010,2155 1810,2155 2160,2155 2610,2155 3310,2155
I\O\R\Q\: J2.20 U22.4 | length 205
  Top Layer w10: v1(750,2195) J2.20@750,2400
M\R\E\Q\: J2.19 U22.6 | length 205
  Top Layer w10: v1(850,2195) J2.19@850,2400
NetC1_2: C1.2 R5.2 U1.1 | length 1265.7
  Top Layer w10: U1.1@2040.24,603.23 v1(2105,603.23) ; v1(2155,285) 2165,275 2685,275 2770,360 2859.37,360 C1.2@2890,390.63 ; C1.2@2890,394.57 R5.2@2965,394.57
  Bottom Layer w10: v1(2105,603.23) 2105,335 v1(2155,285)
NetC2_2: C2.2 R6.2 U1.3 | length 912.9
  Top Layer w10: U1.3@2040.24,654.41 v1(2155,654.41) ; v1(2180,310) 2225,355 2295,355 ; 2270,355 2295,355 ; C2.2@2490,390.63 2454.37,355 2295,355 ; C2.2@2490,394.57 R6.2@2565,394.57
  Bottom Layer w10: v1(2155,654.41) 2155,335 v1(2180,310)
NetC3_2: C3.2 R7.2 U1.5 | length 477.8
  Top Layer w10: U1.5@2040.24,705.59 v1(2132,705.59) ; C3.2@2090,394.57 2132,394.57 ; v1(2132,510) 2132,394.57 ; R7.2@2165,394.57 2132,394.57
  Bottom Layer w10: v1(2132,510) v1(2132,705.59)
NetC4_2: C4.2 R8.2 U1.9 | length 569.7
  Top Layer w10: C4.2@1690,394.57 R8.2@1765,394.57 1765,360 v1(1755,350) ; v1(1755,731.18) U1.9@1819.76,731.18
  Bottom Layer w10: v1(1755,350) v1(1755,731.18)
NetC5_2: C5.2 R13.2 U6.1 | length 1338.2
  Top Layer w10: U6.1@360.24,603.23 v1(438.23,603.23) ; v1(660,285) 730,285 740,275 1245,275 1250,280 1250,345 1256.17,351.17 1286.17,351.17 1290,355 C5.2@1290,390.63 ; C5.2@1293.94,394.57 R13.2@1365,394.57
  Bottom Layer w10: v1(438.23,603.23) 438.23,441.77 595,285 v1(660,285)
NetC6_2: C6.2 R14.2 U6.3 | length 814
  Top Layer w10: U6.3@360.24,654.41 514.41,654.41 v1(515,655) ; v1(675,360) 835,360 865.63,390.63 C6.2@890,390.63 ; C6.2@895,394.57 R14.2@965,394.57
  Bottom Layer w10: v1(515,655) 515,520 v1(675,360)
NetC7_2: C7.2 R15.2 U6.5 | length 611
  Top Layer w10: U6.5@360.24,705.59 v1(464.41,705.59) ; C7.2@490,394.57 R15.2@565,394.57 v1(565,355)
  Bottom Layer w10: v1(464.41,705.59) 464.41,455.59 v1(565,355)
NetC8_2: C8.2 R16.2 U6.9 | length 524.8
  Top Layer w10: C8.2@90,394.57 R16.2@165,394.57 ; C8.2@95,390.63 54.37,390.63 45,400 45,680 96.18,731.18 U6.9@139.76,731.18
NetC9_2: C9.2 R20.2 U23.1 | length 652.2
  Top Layer w10: v1(871.77,603.23) U23.1@920.24,603.23 ; C9.2@895,1094.57 938,1094.57 ; v1(950,1045) 938,1057 938,1094.57 ; R20.2@970,1094.57 938,1094.57
  Bottom Layer w10: v1(871.77,603.23) 950,681.46 v1(950,1045)
NetC10_2: C10.2 R21.2 U23.3 | length 847.5
  Top Layer w10: C10.2@495,1094.57 R21.2@570,1094.57 v1(570,1050) ; v1(815,654.41) U23.3@920.24,654.41
  Bottom Layer w10: v1(570,1050) 570,685 600.59,654.41 v1(815,654.41)
NetC11_2: C11.2 R22.2 U23.5 | length 1348.9
  Top Layer w10: C11.2@95,1090.63 50.63,1090.63 40,1080 40,800 60,780 400,780 425,755 525,755 548,778 777,778 849.41,705.59 U23.5@920.24,705.59 ; C11.2@98.94,1094.57 R22.2@170,1094.57
NetC12_2: C12.2 R36.2 U14.1 | length 771.9
  Top Layer w10: U14.1@2600.24,603.23 v1(2720,603.23) ; v1(2765,1065) 2790.63,1090.63 C12.2@2860,1090.63 ; C12.2@2868.94,1094.57 R36.2@2935,1094.57
  Bottom Layer w10: v1(2720,603.23) 2720,740 2765,785 v1(2765,1065)